# Altium PCB RF_PCB-v1.PcbDoc (part 1 of 2)
Units mil, origin at the board's own origin, x right, y up, seen from the top; angles counter-clockwise.
Board outline 4468.5 x 3267.72 mil, 2 copper layers (Top Layer, Bottom Layer); 64 components, 52 nets, 328 pads, 70 vias.
Unrouted connection lines stored in the file: 1.
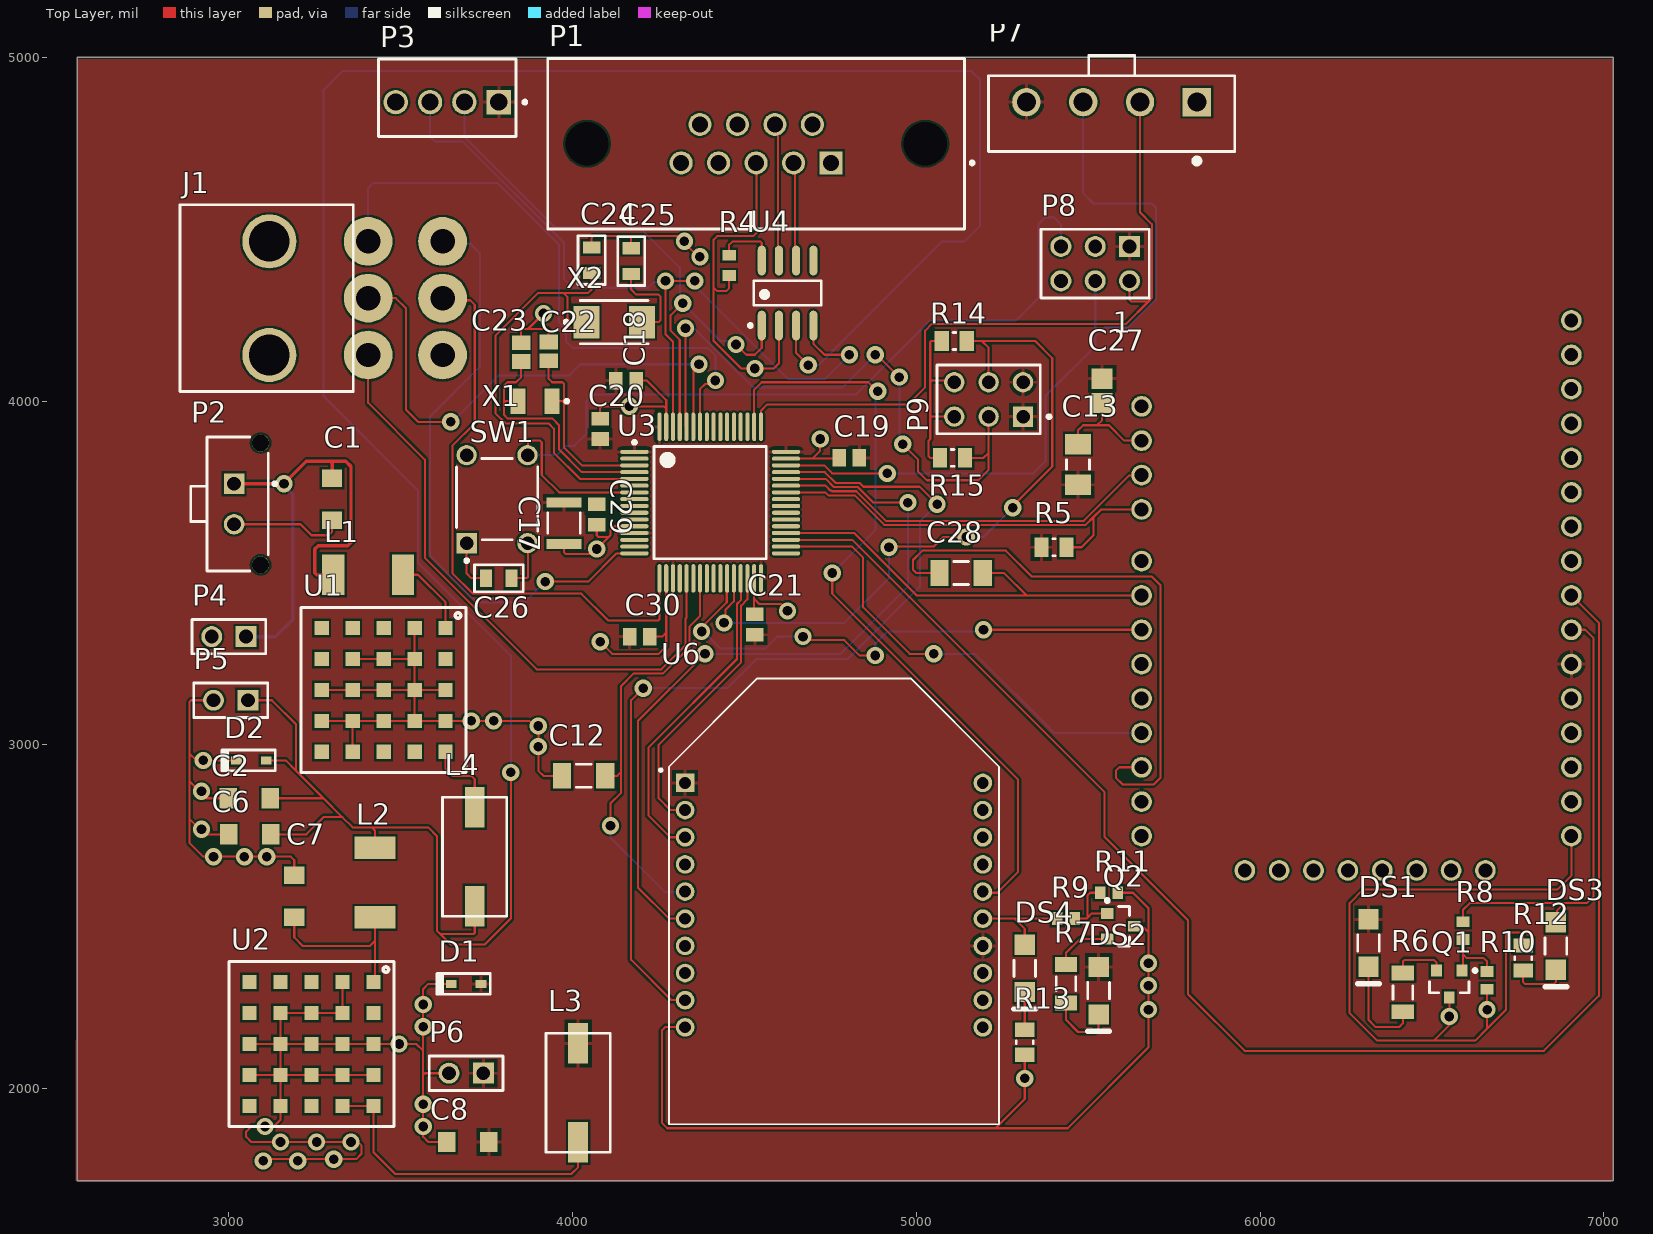
[diagram p0: Top Layer view]
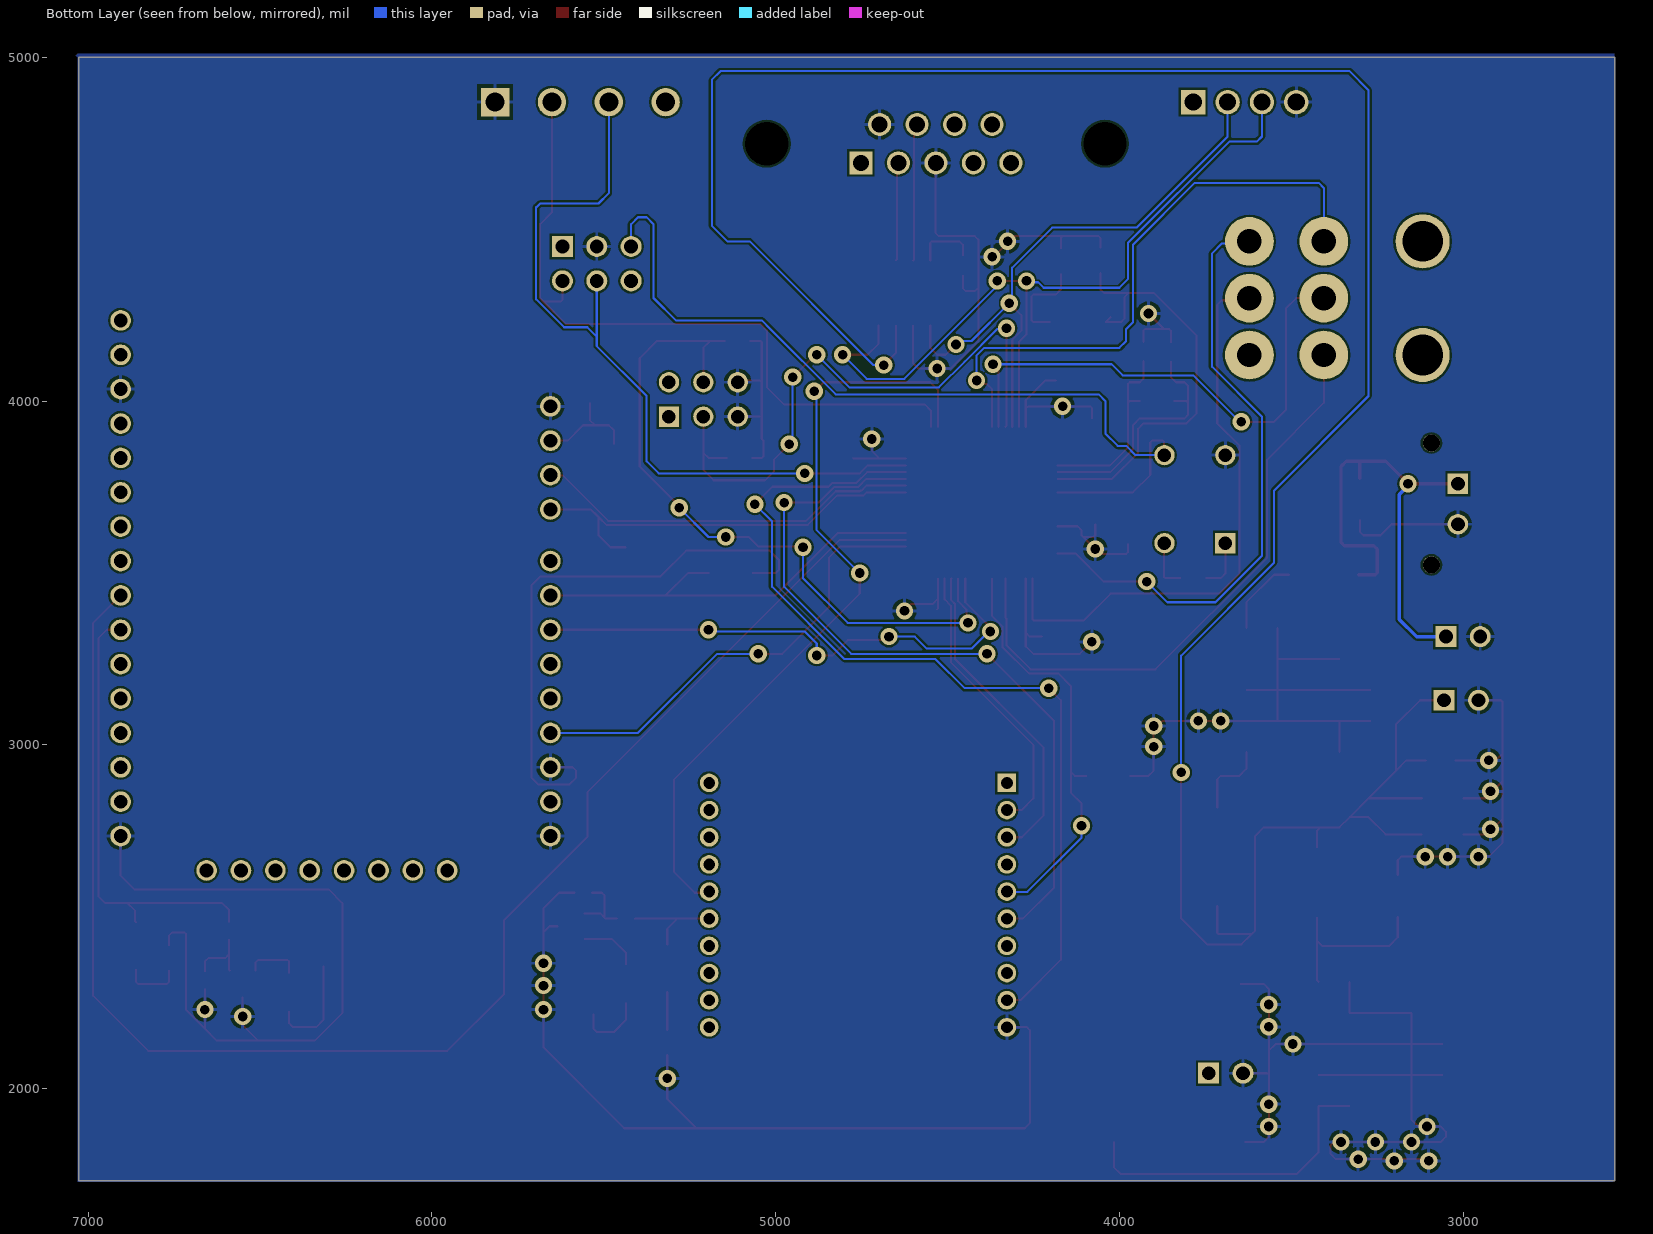
[diagram p1: Bottom Layer view, seen from below]

## Layer stack, top to bottom
Top Solder: solder mask 0.4, Solder Resist, Dk 3.5
Top Layer: signal copper 1.4
Dielectric 1: dielectric 12.6, FR-4, Dk 4.8
Bottom Layer: signal copper 1.4
Bottom Solder: solder mask 0.4, Solder Resist, Dk 3.5

## Board outline
2559.06,1732.28 7027.56,1732.28 7027.56,5000 2559.06,5000

## Design rules (kind name [scope] priority, off if disabled: settings)
Clearance [All] p1: gap=6 ignorepadtopadclearanceinfootprint=FALSE
HoleSize [All] p1: absolutevalues=TRUE maxlimit=3937.01 minlimit=15.75 maxpercent=80.000 minpercent=20.000
PolygonConnect [All] p1: connectstyle=Relief reliefconductorwidth=10 reliefentries=4 polygonreliefangle="90 Angle" airgapwidth=10
RoutingVias [All] p1: holewidth=15.75 width=31.5 viastyle="Through Hole" minholewidth=15.75 minwidth=23.62 maxholewidth=3937.01 maxwidth=3937.01
SilkToSilkClearance [All] p1: silktosilkclearance=0
SilkToSolderMaskClearance [IsPad] p1: minsilkscreentomaskgap=0 clearancetoexposedcopper=TRUE
SolderMaskExpansion [All] p1: expansion=4 istentingtop=FALSE
Width [All] p1: maxlimit=3937.01 minlimit=6 preferedwidth=10
27 further rules are at their usual default settings.

## Classes and differential pairs
component class RF_Xbee: 1 C12 C13 C27 C28 DS1 DS2 DS3 DS4 Q1 Q2 R5 R6 R7 R8 R9 R10 R11 R12 R13 U6
component class RF_STM: C17 C18 C19 C20 C21 C22 C23 C24 C25 C26 C29 C30 J1 P1 P3 P7 P8 P9 R4 R14 R15 SW1 U3 U4 X1 X2
component class RF_Power: C1 C2 C6 C7 C8 D1 D2 L1 L2 L3 L4 P2 P4 P5 P6 U1 U2

## Components (designator, comment, footprint, x,y, rotation, side; value= is the part's Value field where it differs from the comment)
1 "XBEE_SMD_ADAPTER" XBEE_SMD_ADAPTER 6305,3485 r0 top
C1 "10uF" 1206 3300,3715 r270 top
C2 "22uF" 1206 3058.98,2845 r0 top
C6 "10uF" 1206 3060,2740 r180 top
C7 "10uF" 1206 3190,2560 r270 top
C8 "22uF" 1206 3695,1845 r0 top
C12 "0.01uF" CAPC1206(3216)170_M 4032.01,2910 r0 top value=10nF
C13 "1uF" CAPC3216X180X50ML20T25 5470,3815.94 r270 top
C17 "1uF" CAPC3225X270X30LL30 3975,3645 r90 top
C18 "0.1uF" CAPC2013X135X50LL10T20 4155,4060 r180 top
C19 "0.1uF" CAPC2013X135X50LL10T20 4804.53,3835 r0 top
C20 "0.1uF" CAPC2013X135X50LL10T20 4080,3919.53 r270 top
C21 "0.1uF" CAPC2013X135X50LL10T20 4530,3350 r270 top
C22 "6nF" CAPC2013X140X50LL20T25 3930,4145 r270 top
C23 "6nF" CAPC2013X140X50LL20T25 3850,4142.56 r270 top
C24 "20pF" C0805 4055,4410 r270 top
C25 "20pF" C0805 4170,4407.4 r270 top
C26 "0.1uF" C0805 3785,3485 r180 top
C27 "100pF" CAPC2013X88X50ML20T25 5540,4030 r90 top
C28 "0.01uF" CAPC1206(3216)170_M 5130,3500 r0 top value=10nF
C29 "0.1uF" CAPC2013X135X50LL10T20 4070,3670 r90 top
C30 "0.1uF" CAPC2013X135X50LL10T20 4195,3315 r180 top
D1 "TVS Diode 3V3" SOD-323 3690,2305 r0 top
D2 "TVS Diode 5V" SOD-323 3065,2955 r0 top
DS1 "HSMH-C150" AVAG-HSMX-C150_V 6315,2423.9 r270 top
DS2 "HSMH-C150" AVAG-HSMX-C150_V 5530,2285 r270 top
DS3 "HSMH-C150" AVAG-HSMX-C150_V 6860,2415 r270 top
DS4 "HSMH-C150" AVAG-HSMX-C150_V 5315,2350 r270 top
J1 "0353180620" "Mini-fit Jr. 6pos" 3369.57,4299.65 r270 top
L1 "70" 1812#1 3405,3495 r180 top
L2 "70" 1812#2 3425,2600 r270 top
L3 "98" 7427932 4015.75,1988.19 r90 top
L4 "98" 7427932 3715,2675 r270 top
P1 "171-009-113R911" NORCO-171-009-113R911_V 4533.58,4749.09 r180 top
P2 "66200211122" 66200211122 3025.04,3700.94 r90 top
P3 "640456-4" TECO-640456-4 3635,4870 r0 top
P4 "12V EXT" SMTC-TSW-102-26-XX-S 3050,3315 r180 top
P5 "5V EXT" SMTC-TSW-102-26-XX-S 3055,3130 r180 top
P6 "3V3 EXT" SMTC-TSW-102-26-XX-S 3740,2045 r180 top
P7 "64900411122" 64900411122 5567.68,4836.54 r0 top
P8 "SWD" SMTC-TSW-103-08-X-D 5620,4450 r180 top
P9 "M20-9980346" HRWN-M20-9980346_V 5210,4005 r180 top
Q1 "BJT" ONSC-SOT-23-3-318-08_V 6550,2304.37 r270 top
Q2 "BJT" ONSC-SOT-23-3-318-08_V 5594.37,2472.6 r0 top
R4 "1K" RESC1608X55X25ML10T15 4455,4395 r90 top
R5 "1K" RESC2013X50X30NL20T20 5400,3575 r180 top
R6 "464 Ohm" RESC3216X70X50NL05T20 6415,2280 r270 top
R7 "464 Ohm" RESC3216X70X50NL05T20 5435,2305 r270 top
R8 "10K" RESC1609X50X30NL8T20 6590,2460 r270 top
R9 "10K" RESC1609X50X30NL8T20 5435,2495 r0 top
R10 "10K" RESC1609X50X30NL8T20 6660,2315 r270 top
R11 "10K" RESC1609X50X30NL8T20 5560,2570 r0 top
R12 "1K" RESC2013X50X30NL20T20 6765,2380 r270 top
R13 "1K" RESC2013X50X30NL20T20 5315,2135 r90 top
R14 "1K" RESC2013X50X30NL20T20 5110,4175 r0 top
R15 "1K" RESC2013X50X30NL20T20 5105,3835 r0 top
SW1 "PTS645SM43SMTR92LFS" ITT-PTS645S-4_V 3780,3715 r90 top
U1 "RPM5.0-1.0" 25-BLGA 3449.84,3160 r270 top
U2 "RPM3.3-1.0" 25-BLGA 3240,2130 r270 top
U3 "STM32F107RCT6" STM-LQFP64_M 4400,3705 r0 top
U4 "MCP2551-I/SN" SOIC-SN8_N 4625,4314.49 r90 top
U6 "XBP24CAUIT-001" *MODULE_XBP24CAUIT-001 4760,2545 r0 top
X1 "32.768KHz" ABRA-ABS07-2_V 3890,4000 r180 top
X2 "8MHz" ABRA-ABM3-2_V 4120.71,4230 r0 top

## Footprints (in the part's own frame and the unit in brackets; to place one, negate y for a bottom-side part, rotate by r counter-clockwise, add the part's x,y. Pads: shape width x height; smd on the part's side, far side on the other; paste and mask are expansions set on the pad)
25-BLGA [mm]
  rect 1.06x1.06 smd: A1(-4.58,4.58) A2(-2.29,4.58) A3(0,4.58) A4(2.29,4.58) A5(4.58,4.58) B1(-4.58,2.29) B2(-2.29,2.29) B3(0,2.29) B4(2.29,2.29) B5(4.58,2.29) C1(-4.58,0) C2(-2.29,0) C3(0,0) C4(2.29,0) C5(4.58,0) D1(-4.58,-2.29) D2(-2.29,-2.29) D3(0,-2.29) D4(2.29,-2.29) D5(4.58,-2.29) E1(-4.58,-4.58) E2(-2.29,-4.58) E3(0,-4.58) E4(2.29,-4.58) E5(4.58,-4.58)
  silkscreen extent -6.09,-6.09 6.09,6.09
1206 [mil]
  rect 51.18x59.06 smd: 1(-61.02,0) 2(61.02,0)
1812#1 [mm]
  rect 1.65x3 smd: 1(2.575,0) 2(-2.575,0)
1812#2 [mm]
  rect 1.65x3 smd: 1(-2.575,0) 2(2.575,0)
7427932 [mm]
  rect 3x1.47 smd: 1(-3.65,0) 2(3.65,0)
  silkscreen extent -4.4,-2.37 4.4,2.37, body extent -4.1,-2.38 4.1,2.37, height 3.21
64900411122 [mm] "4.20mm Male Single Row Vertical Header, 4p"
  rect 2.1x2.1 hole 1.4: 1(6.3,0.85)
  round 2.1 hole 1.4: 2(2.1,0.85) 3(-2.1,0.85) 4(-6.3,0.85)
  silkscreen extent -9.1,-3.7 9.1,4.3, body extent -9,-2.7 9,4.2, height 12.83
66200211122 [mm] "3.00mm Male Single Row Vertical Header, 2p"
  rect 1.52x1.52 hole 1.02: 1(1.5,0.255)
  round 1.52 hole 1.02: 2(-1.5,0.255)
  round 1.27 hole 1.27 unplated: MH1(-4.5,-1.705) MH2(4.5,-1.705)
  silkscreen extent -4.95,-2.88 4.95,3.46, body extent -4.83,-2.18 4.83,3.38, height 9.93
*MODULE_XBP24CAUIT-001 [mil]
  rect 54.25x54.25 hole 34.25: 1(-433,344.5)
  round 54.25 hole 34.25: 2(-433,265.5) 3(-433,186.5) 4(-433,107.5) 5(-433,28.5) 6(-433,-50.5) 7(-433,-129.5) 8(-433,-208.5) 9(-433,-287.5) 10(-433,-366.5) 11(433,-366.5) 12(433,-287.5) 13(433,-208.5) 14(433,-129.5) 15(433,-50.5) 16(433,28.5) 17(433,107.5) 18(433,186.5) 19(433,265.5) 20(433,344.5)
  silkscreen extent -508,-648 480,648
ABRA-ABM3-2_V [mm] "SMD, 2-Leads, Body 5x3.2mm, Pitch 4.1mm"
  rect 1.9x2.4 smd: 1(-2.05,0) 2(2.05,0)
  silkscreen extent -3.67,-1.6 2.5,1.6, body extent -2.5,-1.6 2.5,1.6, height 1.3
ABRA-ABS07-2_V [mm] "Hand Drawn, 2-Leads, Body 3.2x1.5mm, Pitch 2.5mm"
  rect 1.1x1.9 smd: 1(-1.25,0) 2(1.25,0)
  silkscreen extent -2.48,-0.12 -2.23,0.12, body extent -1.6,-0.75 1.6,0.75, height 0.9
AVAG-HSMX-C150_V [mm] "SMD, 2-Leads, Body 3.2x1.6mm"
  rect 1.5x1.5 smd: 1(-1.75,0) 2(1.75,0)
  silkscreen extent -0.6,-0.8 3,0.8, body extent -1.6,-0.8 1.6,0.8, height 1.1
C0805 [mm]
  rect 0.9x1.3 smd: 1(-0.95,0) 2(0.95,0)
  silkscreen extent -1.8,-1 1.8,1, body extent -1.05,-0.67 1.05,0.67, height 0.94
CAPC1206(3216)170_M [mm] "Chip Capacitor, Body 3.2x1.6mm, Height 1.7mm, IPC Low Density"
  rect 1.35x1.9 smd: 1(-1.6,0) 2(1.6,0)
  silkscreen extent -0.55,-0.85 0.55,0.85, body extent -1.7,-0.9 1.7,0.9, height 1.7
CAPC2013X88X50ML20T25 [mm] "Chip Capacitor, 2-Leads, Body 2.00x1.25mm, IPC Low Density"
  rect 1.5x1.55 smd: 1(-0.9,0) 2(0.9,0)
  body extent -1.1,-0.72 1.1,0.72, height 0.88
CAPC2013X135X50LL10T20 [mm] "Chip Capacitor, 2-Leads, Body 2.00x1.25mm, IPC High Density"
  rect 1x1.3 smd: 1(-0.75,0) 2(0.75,0)
  body extent -1.05,-0.67 1.05,0.68, height 1.35
CAPC2013X140X50LL20T25 [mm] "Chip Capacitor, 2-Leads, Body 2.00x1.25mm, IPC High Density"
  rect 1.1x1.35 smd: 1(-0.7,0) 2(0.7,0)
  body extent -1.1,-0.72 1.1,0.72, height 1.4
CAPC3216X180X50ML20T25 [mm] "Chip Capacitor, 2-Leads, Body 3.40x1.80mm, IPC Low Density"
  rect 1.5x1.9 smd: 1(-1.5,0) 2(1.5,0)
  silkscreen extent -0.35,-0.85 0.35,0.85, body extent -1.7,-0.9 1.7,0.9, height 1.8
CAPC3225X270X30LL30 [mm] "Chip Capacitor, 2-Leads, Body 3.5x2.7mm, IPC High Density"
  rect 0.75x2.6 smd: 1(-1.525,0) 2(1.525,0)
  silkscreen extent -0.75,-1.2 0.75,1.2, body extent -1.75,-1.35 1.75,1.35, height 2.7
HRWN-M20-9980346_V [mm] "THD, 6-Leads, Body 7.62x5.08mm, Pitch 2.54mm"
  rect 1.5x1.5 hole 1: 1(-2.54,1.27)
  round 1.5 hole 1: 2(-2.54,-1.27) 3(0,1.27) 4(0,-1.27) 5(2.54,1.27) 6(2.54,-1.27)
  silkscreen extent -4.59,-2.54 3.81,2.54, body extent -3.81,-2.54 3.81,2.54, height 8.64
ITT-PTS645S-4_V [mm] "TH, 4-Leads, Body 6x6mm"
  rect 1.5x1.5 hole 1: 1(-3.25,2.25)
  round 1.5 hole 1: 2(3.25,2.25) 3(-3.25,-2.25) 4(3.25,-2.25)
  silkscreen extent -4.67,-3 3,3, body extent -3,-3 3,3, height 4.4
"Mini-fit Jr. 6pos" [mm]
  round 3.6 hole 1.8: 1(-4.2,6.4) 2(0,6.4) 3(4.2,6.4) 4(-4.2,0.9) 5(0,0.9) 6(4.2,0.9)
  round 4 hole 3: ""(-4.2,-6.4) ""(4.2,-6.4)
  silkscreen extent -6.9,-13 6.9,-0.2, body extent -6.9,-13 7.3,6.94, height 11.41
NORCO-171-009-113R911_V [mm] "THD, 9-Leads, Body 30.8x12.6mm, Pitch 2.77mm"
  rect 1.7x1.7 hole 1.194: 1(-5.54,1.42)
  round 1.7 hole 1.194: 2(-2.77,1.42) 3(0,1.42) 4(2.77,1.42) 5(5.54,1.42) 6(-4.155,-1.42) 7(-1.385,-1.42) 8(1.385,-1.42) 9(4.155,-1.42)
  round 2.9 hole 3.2 unplated: MH1(-12.495,0) MH2(12.495,0)
  silkscreen extent -16.09,-6.3 15.4,6.3, body extent -15.4,-6.3 15.41,6.3, height 13.24
ONSC-SOT-23-3-318-08_V [mm] "SOT23, 3-Leads, Body 2.92x1.3mm, Pitch 0.95mm"
  rect 0.9x0.8 smd: 1(-1,0.95) 2(-1,-0.95) 3(1,0)
  silkscreen extent -1.12,-1.46 0.65,2.03, body extent -0.65,-1.46 0.65,1.46, height 1.11
RESC1608X55X25ML10T15 [mm] "Chip Resistor, 2-Leads, Body 1.60x0.80mm, IPC Low Density"
  rect 0.8x1 smd: 1(-0.75,0) 2(0.75,0)
  body extent -0.85,-0.45 0.85,0.45, height 0.55
RESC1609X50X30NL8T20 [mm] "Chip Resistor, 2-Leads, Body 1.65x0.95mm, IPC Medium Density"
  rect 0.8x0.95 smd: 1(-0.65,0) 2(0.65,0)
  body extent -0.82,-0.48 0.82,0.48, height 0.5
RESC2013X50X30NL20T20 [mm] "Chip Resistor, 2-Leads, Body 2.00x1.25mm, IPC Medium Density"
  rect 1.05x1.45 smd: 1(-0.925,0) 2(0.925,0)
  silkscreen extent -0.1,-0.63 0.1,0.63, body extent -1.1,-0.72 1.1,0.72, height 0.5
RESC3216X70X50NL05T20 [mm] "Chip Resistor, 2-Leads, Body 3.20x1.60mm, IPC Medium Density"
  rect 1.1x1.65 smd: 1(-1.425,0) 2(1.425,0)
  silkscreen extent -0.5,-0.72 0.5,0.72, body extent -1.63,-0.82 1.62,0.82, height 0.7
SMTC-TSW-102-26-XX-S [mm] ".025 SQ Post Terminal Strip Assembly, 1x2 Pins, Vertical, 2.54mm Pitch, Male"
  rect 1.55x1.55 hole 1.02: 1(0,0)
  round 1.55 hole 1.02: 2(2.54,0)
  silkscreen extent -1.46,-1.27 4,1.27, body extent -1.4,-1.27 3.81,1.27, height 8.38
SMTC-TSW-103-08-X-D [mm] ".025 SQ Post Terminal Strip Assembly, 2x3 Pins, Vertical, 2.54mm Pitch, Male"
  rect 1.55x1.55 hole 1.02: 1(0,0)
  round 1.55 hole 1.02: 2(0,2.54) 3(2.54,0) 4(2.54,2.54) 5(5.08,0) 6(5.08,2.54)
  silkscreen extent -1.46,-1.27 6.54,3.81, body extent -1.27,-1.27 6.35,3.81, height 8.38
SOD-323 [mm] "SOD, 2-Leads, Body 1.7x1.25mm"
  rect 0.8x0.6 smd: 1(-1.1,0) 2(1.1,0)
  silkscreen extent -2.16,-0.76 1.78,0.76, body extent -1.3,-0.67 1.3,0.68, height 1.1
SOIC-SN8_N [mm] "SOIC, 8-Leads, Body 4.9x3.9mm, Pitch 1.27mm, IPC Medium Density"
  oval 2.2x0.6 smd: 1(-2.4,1.905) 2(-2.4,0.635) 3(-2.4,-0.635) 4(-2.4,-1.905) 5(2.4,-1.905) 6(2.4,-0.635) 7(2.4,0.635) 8(2.4,1.905)
  silkscreen extent -2.52,-2.5 0.9,2.88, body extent -2,-2.5 2,2.5, height 1.75
STM-LQFP64_M [mm] "Thin QFP, 64-Leads, Body 10x10mm, Pitch 0.5mm, IPC Low Density"
  oval 2.1x0.3 smd: 1(-5.6,3.75) 2(-5.6,3.25) 3(-5.6,2.75) 4(-5.6,2.25) 5(-5.6,1.75) 6(-5.6,1.25) 7(-5.6,0.75) 8(-5.6,0.25) 9(-5.6,-0.25) 10(-5.6,-0.75) 11(-5.6,-1.25) 12(-5.6,-1.75) 13(-5.6,-2.25) 14(-5.6,-2.75) 15(-5.6,-3.25) 16(-5.6,-3.75) 33(5.6,-3.75) 34(5.6,-3.25) 35(5.6,-2.75) 36(5.6,-2.25) 37(5.6,-1.75) 38(5.6,-1.25) 39(5.6,-0.75) 40(5.6,-0.25) 41(5.6,0.25) 42(5.6,0.75) 43(5.6,1.25) 44(5.6,1.75) 45(5.6,2.25) 46(5.6,2.75) 47(5.6,3.25) 48(5.6,3.75)
  oval 0.3x2.1 smd: 17(-3.75,-5.6) 18(-3.25,-5.6) 19(-2.75,-5.6) 20(-2.25,-5.6) 21(-1.75,-5.6) 22(-1.25,-5.6) 23(-0.75,-5.6) 24(-0.25,-5.6) 25(0.25,-5.6) 26(0.75,-5.6) 27(1.25,-5.6) 28(1.75,-5.6) 29(2.25,-5.6) 30(2.75,-5.6) 31(3.25,-5.6) 32(3.75,-5.6) 49(3.75,5.6) 50(3.25,5.6) 51(2.75,5.6) 52(2.25,5.6) 53(1.75,5.6) 54(1.25,5.6) 55(0.75,5.6) 56(0.25,5.6) 57(-0.25,5.6) 58(-0.75,5.6) 59(-1.25,5.6) 60(-1.75,5.6) 61(-2.25,5.6) 62(-2.75,5.6) 63(-3.25,5.6) 64(-3.75,5.6)
  silkscreen extent -5.72,-4.15 4.15,4.57, body extent -5,-5 5,5, height 1.6
TECO-640456-4 [mm] "Through Hole, 4-Leads, Body 10.16x5.72mm, Pitch 2.54mm"
  rect 1.8x1.8 hole 1.27 paste+0: 1(3.81,0)
  round 1.8 hole 1.27 paste+0: 2(1.27,0) 3(-1.27,0) 4(-3.81,0)
  silkscreen extent -5.08,-2.54 5.86,3.18, body extent -5.08,-2.54 5.08,3.18, height 10.03
XBEE_SMD_ADAPTER [mil]
  round 60.24 / inner round 60 / far side round 60.24 hole 40.16: 1(-650,500) 2(-650,400) 3(-650,300) 4(-650,200) 5(-650,50) 6(-650,-50) 7(-650,-150) 8(-650,-250) 9(-650,-350) 10(-650,-450) 11(-650,-550) 12(-650,-650) 13(-650,-750) 14(-350,-850) 15(-250,-850) 16(-150,-850) 17(-50,-850) 18(50,-850) 19(150,-850) 20(250,-850) 21(350,-850) 22(600,-750) 23(600,-650) 24(600,-550) 25(600,-450) 26(600,-350) 27(600,-250) 28(600,-150) 29(600,-50) 30(600,50) 31(600,150) 32(600,250) 33(600,350) 34(600,450) 35(600,550) 36(600,650) 37(600,750)

## Part data
C1 C6 C7: library part CL31B106KAHNFNE, "CAP CER 10UF 25V X7R 1206", Case Code (Imperial)=1206, Case Code (Metric)=3216, Dielectric=X7R, Manufacturer=Samsung, Max Operating Temperature=125°C, Min Operating Temperature=-55°C, Package Quantity=1, Supplier Part Number 1=1276-3100-1-ND, Tolerance=10%, Voltage Rating=25V, Capacitance=10uF, Case/Package=1206, Category="Ceramic Capacitors", ComponentLink1Description=https://datasheet.ciiva.com/25795/cl31b106kahnfne-25795136.pdf?src-supplier=Digi-Key, ComponentLink1URL=https://datasheet.ciiva.com/25795/cl31b106kahnfne-25795136.pdf?src-supplier=Digi-Key, Depth=1.6mm, Height=1.6mm, Lead Free="Lead Free", Length=3.2mm, Manufacturer Part Number=CL31B106KAHNFNE, Mount="Surface Mount", Packaging="Tape and Reel", Radiation Hardening=No, RoHS=Yes, Stock 1=1201, Supplier 1=Digi-Key, Thickness=0.071inch, Width=0.063inch
C2 C8: library part CL31B226KPHNNNE, "CAP CER 22UF 10V X7R 1206", Case Code (Imperial)=1206, Case Code (Metric)=3216, Dielectric=X7R, Manufacturer=Samsung, Max Operating Temperature=125°C, Min Operating Temperature=-55°C, Package Quantity=2000, Supplier Part Number 1=1276-2769-1-ND, Tolerance=10%, Voltage Rating=10V, Capacitance=22uF, Case/Package=1206, Category="Ceramic Capacitors", ComponentLink1Description=https://datasheet.ciiva.com/25724/cl31b226kphnnne-25724443.pdf?src-supplier=Digi-Key, ComponentLink1URL=https://datasheet.ciiva.com/25724/cl31b226kphnnne-25724443.pdf?src-supplier=Digi-Key, ComponentLink2Description=https://datasheet.ciiva.com/16384/cl31b226kphnnne-16384588.pdf?src-supplier=Future+Electronics, ComponentLink2URL=https://datasheet.ciiva.com/16384/cl31b226kphnnne-16384588.pdf?src-supplier=Future+Electronics, ComponentLink3Description=https://datasheet.ciiva.com/26838/getdatasheetpartid-710483-26838941.pdf?src-supplier=Verical, ComponentLink3URL=https://datasheet.ciiva.com/26838/getdatasheetpartid-710483-26838941.pdf?src-supplier=Verical, Contact Plating=Tin, Depth=1.6mm, Lead Free="Lead Free", Length=3.2mm, Manufacturer Part Number=CL31B226KPHNNNE, Mount="Surface Mount", Packaging="Tape and Reel", Radiation Hardening=No, RoHS=Yes, Stock 1=617814, Supplier 1=Digi-Key, Termination=Wraparound, Thickness=0.071inch, Voltage Rating (DC)=10V, Width=0.063inch
C12 C28: library part CMP-1037-03508-1, "CAP 10nF 50V ±5% 1206 (3216 Metric) Thickness 1.7mm SMD", Case-EIA=1206, Case-Metric=3216, Rated Voltage="50 V", Tolerance=Â±5%, Max Thickness="1.7 mm", Technology=SMT
C13: library part CMP-2000-04991-1, "Chip Capacitor, 1 uF, +/- 10%, 25 V, -55 to 125 degC, 1206 (3216 Metric), RoHS, Tape and Reel", Capacitance - nF=1000nF, Case Code - in=1206, Case Code - mm=3216, Case Height=1.6mm, Case Length=3.2mm, Dielectric=X7R, Manufacturer=Kemet, Maximum Operating Temperature=+125C, Minimum Operating Temperature=-55C, Operating Temperature Range=-55Cto+125C, Package / Case=1206(3216metric), Package Description="2-Pin Surface Mount Device, Body 3.2 x 1.6 mm", Temperature Coefficient / Code=+/-15%, Tolerance=10%, Voltage Rating=25V, =C1206C105K3RAC7800, Brand=Kemet, Capacitance=1uF, Case Width=1.6mm, Class=Class1, Datasheet URL=https://ciiva.com/datasheet-click-18194173?src=ciiva&sig=6daff8c4, Datasheet Version=Jul-14, Dimensions=1.6mmWx3.2mmLx1.6mmH, Factory Pack Quantity=2000, Manufacturer URL=http://www.kemet.com/, Package Reference=1206, Packaging=Reel, Product=GeneralTypeMLCCs, Product Category=MultilayerCeramicCapacitorsMLCC-SMD/SMT, RoHS=Details, Series=C1206C, Termination Style=SMD/SMT, Type=SMDMLCCX7R6.3-250VDCCommericalGrade, Voltage Rating DC=25V
C17: library part CMP-2000-06366-1, "Chip Capacitor, 1 uF, +/- 10%, 100 V, -55 to 125 degC, 1210 (3225 Metric), RoHS, Tape and Reel", Capacitance=1µF, Manufacturer=Murata, Operating Temperature=-55°C~125°C, Package / Case=1210(3225Metric), Package Description="2-Pin Surface Mount Device, Body 3.2 x 2.5 mm", Package Reference=1210, Ratings=-, Standard Package=1, Temperature Coefficient=X7R, Tolerance=±10%, Voltage - Rated=100V, Applications=GeneralPurpose, Catalog Drawings=GRMSeries_1210_2.5, Category=Capacitors, Datasheet URL=http://search.murata.co.jp/Ceramy/image/img/A01X/G101/ENG/GRM32ER72A105KA01-01.pdf, Datasheet Version=02/2016, Family=CeramicCapacitors, Featured Product=GA3SafetyRecognizedCapsandHi-CapMLCC, Features=-, Height - Seated (Max)=-, Lead Spacing=-, Lead Style=-, Manufacturer URL=http://www.murata.com/, Mounting Technology=SurfaceMount, Mounting Type=SurfaceMount,MLCC, Online Catalog=GRMSeries, Other Names=490-1857-6, Packaging=Digi-Reel®, Product Training Modules=High-CapMultilayerCeramicCapacitors, Series=GRM, Size / Dimension="0.126\"Lx0.098\"W(3.20mmx2.50mm)", Thickness (Max)="0.106\"(2.70mm)"
C18 C19 C20 C21 C29 C30: library part CMP-2007-03453-1, Manufacturer=Murata, Part Number=GRM21BR61C106KE15L
C22 C23: library part CMP-2000-05810-1, "Chip Capacitor, 2.2 uF, +/- 10%, 10 V, -55 to 85 degC, 0805 (2012 Metric), RoHS, Tape and Reel", Capacitance=2.2µF, Case Size/Dimension=0805, Dielectric=X5R, Manufacturer=AVX, Package Description="2-Pin Surface Mount Device, Body 2.01 x 1.25 mm", Rated Voltage=10V, Tolerance (%)=±10%, Datasheet URL=http://datasheets.avx.com/cx5r.pdf, Datasheet Version=05/2016, Manufacturer URL=http://www.avx.com/, Mounting Technology=SurfaceMount, Package Reference=0805
C24 C25: library part C0805C200J5GACTU, "CAP CER 20PF 50V C0G/NP0 0805", Capacitance=10nF, Case Code (Imperial)=0805, Case Code (Metric)=2012, Dielectric=X7R, Manufacturer=Samsung, Manufacturer Part Number=CL21B103KBANNNC, Max Operating Temperature=125°C, Min Operating Temperature=-55°C, Supplier Part Number 1=399-8033-1-ND, Tolerance=10%, Voltage=50V, Case/Package=0805, Category=Capacitors, ComponentLink1Description=https://www.digikey.com/product-detail/en/kemet/C0805C200J5GACTU/399-8033-1-ND/3471756, ComponentLink1URL=https://www.digikey.com/product-detail/en/kemet/C0805C200J5GACTU/399-8033-1-ND/3471756, Contact Plating=Tin, Depth=1.25mm, Height=0.65mm, Lead Free="Lead Free", Length=2mm, Material=Ceramic, Mount="Surface Mount", Packaging="Tape and Reel", Radiation Hardening=No, RoHS=Yes, Supplier 1=Digi-Key, Thickness=0.03inch, Voltage Rating=50V, Voltage Rating (DC)=50V, Width=0.049inch
C26: library part CL21B104KBCWPNC, "CAP CER 0.1UF 50V X7R 0805", Capacitance=100nF, Case Code (Imperial)=0805, Case Code (Metric)=2012, Manufacturer=Samsung, Max Operating Temperature=125°C, Min Operating Temperature=-55°C, Ratings=AEC-Q200, Supplier Part Number 1=1276-6557-1-ND, Tolerance=10%, Voltage Rating=50V, Case/Package=0805, Category=Capacitors, Features="Soft Termination", Length=0.079inch, Manufacturer Part Number=CL21B104KBCWPNC, Mount="Surface Mount", Packaging="Tape and Reel", Pricing 1="1 = 0.10000, 10 = 0.06700, 100 = 0.02990, 500 = 0.02138, 1000 = 0.01680 (USD)", RoHS=Yes, Stock 1=6545, Supplier 1=Digi-Key, Thickness=0.053inch, Width=0.049inch
C27: library part CMP-2007-00223-1, Manufacturer=Kemet, Part Number=C0805C101J2GACTU
D1: library part CDSOD323-T03S, "ESD Suppressor TVS ±30kV 2-Pin SOD-323 T/R", Breakdown Voltage=4V, Capacitance=500pF, Case/Package=SOD-323-2, Clamping Voltage=10.9V, Leakage Current=125uA, Manufacturer=Bourns, Max Operating Temperature=150°C, Max Power Dissipation=500W, Max Surge Current=43A, Min Operating Temperature=-55°C, Operating Supply Voltage=3.3V, Package Quantity=3000, Power Line Protection=No, Supplier Part Number 1=CDSOD323-T03SCT-ND, Category="Circuit Protection", ComponentLink1Description=https://datasheet.ciiva.com/22685/1671000-22685541.pdf?src-supplier=Element14, ComponentLink1URL=https://datasheet.ciiva.com/22685/1671000-22685541.pdf?src-supplier=Element14, ComponentLink2Description=https://datasheet.ciiva.com/6575/cdsod323-txxsc-6575941.pdf?src-supplier=Digi-Key, ComponentLink2URL=https://datasheet.ciiva.com/6575/cdsod323-txxsc-6575941.pdf?src-supplier=Digi-Key, ComponentLink3Description=https://datasheet.ciiva.com/11193/cdsod323-txxsc-11193742.pdf?src-supplier=Avnet, ComponentLink3URL=https://datasheet.ciiva.com/11193/cdsod323-txxsc-11193742.pdf?src-supplier=Avnet, Composition=Zener, Contact Plating=Tin, Depth=1.45mm, Direction=Unidirectional, Element Configuration=Single, Length=1.9mm, Manufacturer Part Number=CDSOD323-T03S, Min Breakdown Voltage=4V, Mount="Surface Mount", Number of Channels=1, Number of Pins=2, Number of Unidirectional Channels=1, Packaging="Tape and Reel", Peak Pulse Current=43A, Peak Pulse Power=500W, Polarity=Unidirectional, Pricing 1="1 = 0.72000, 10 = 0.60600, 25 = 0.53000, 100 = 0.45420, 250 = 0.39368, 500 = 0.33310, 1000 = 0.25740 (USD)", Radiation Hardening=No, REACH SVHC="No SVHC", Reverse Standoff Voltage=3.3V, RoHS=Yes, Stock 1=99362, Supplier 1=Digi-Key, Termination=SMD/SMT, Working Voltage=3.3V
D2: library part SD05T1G, "TVS DIODE 5V 9.8V SOD323", Breakdown Voltage=6.75V, Capacitance=350pF, Case/Package=SOD-323-2, Clamping Voltage=14.5V, Leakage Current=10uA, Manufacturer="ON Semiconductor", Max Breakdown Voltage=7.3V, Max Operating Temperature=150°C, Max Output Current=24A, Max Power Dissipation=200mW, Min Breakdown Voltage=6.2V, Min Operating Temperature=-55°C, Operating Supply Voltage=5V, Package Quantity=1, Peak Pulse Power=350W, Power Line Protection=No, Supplier Part Number 1=SD05T1GOSCT-ND, Test Current=1mA, Category="Circuit Protection", ComponentLink1Description=https://datasheet.ciiva.com/4507/sd05t1-d-241634-4507873.pdf?src-supplier=Mouser, ComponentLink1URL=https://datasheet.ciiva.com/4507/sd05t1-d-241634-4507873.pdf?src-supplier=Mouser, ComponentLink2Description=https://datasheet.ciiva.com/16200/sd05t1-d-16200994.pdf?src-supplier=Future+Electronics, ComponentLink2URL=https://datasheet.ciiva.com/16200/sd05t1-d-16200994.pdf?src-supplier=Future+Electronics, ComponentLink3Description=https://datasheet.ciiva.com/15143/getdatasheetpartid-117154-15143559.pdf?src-supplier=Verical, ComponentLink3URL=https://datasheet.ciiva.com/15143/getdatasheetpartid-117154-15143559.pdf?src-supplier=Verical, ComponentLink4Description=https://datasheet.ciiva.com/30478/0900766b81250bd7-30478714.pdf?src-supplier=RSComponents, ComponentLink4URL=https://datasheet.ciiva.com/30478/0900766b81250bd7-30478714.pdf?src-supplier=RSComponents, ComponentLink5Description=https://datasheet.ciiva.com/339/sd05t1-d-339830.pdf?src-supplier=Digi-Key, ComponentLink5URL=https://datasheet.ciiva.com/339/sd05t1-d-339830.pdf?src-supplier=Digi-Key, ComponentLink6Description=https://datasheet.ciiva.com/339/sd05t1-d-339831.pdf?src-supplier=Digi-Key, ComponentLink6URL=https://datasheet.ciiva.com/339/sd05t1-d-339831.pdf?src-supplier=Digi-Key, ComponentLink7Description=https://datasheet.ciiva.com/11193/sd05t1-d-11193467.pdf?src-supplier=Avnet, ComponentLink7URL=https://datasheet.ciiva.com/11193/sd05t1-d-11193467.pdf?src-supplier=Avnet, ComponentLink8Description=https://datasheet.ciiva.com/22637/1878253-22637228.pdf?src-supplier=Element14, ComponentLink8URL=https://datasheet.ciiva.com/22637/1878253-22637228.pdf?src-supplier=Element14, ComponentLink9Description=https://datasheet.ciiva.com/25956/sd05t1-d-25956638.pdf?src-supplier=Avnet+Europe, ComponentLink9URL=https://datasheet.ciiva.com/25956/sd05t1-d-25956638.pdf?src-supplier=Avnet+Europe, Composition=Zener, Contact Plating=Tin, Depth=1.25mm, Direction=Unidirectional, Element Configuration=Single, ESD Protection=Yes, Height=1mm, Lead Free="Lead Free", Length=1.7mm, Manufacturer Part Number=SD05T1G, Max Reverse Leakage Current=10uA, Max Surge Current=24A, Number of Elements=1, Number of Pins=2, Number of Unidirectional Channels=1, Packaging="Tape and Reel", Peak Pulse Current=24A, Polarity=Unidirectional, Power Dissipation=350W, Pricing 1="1 = 0.49000, 10 = 0.36500, 100 = 0.20680, 500 = 0.13698, 1000 = 0.10502 (USD)", Radiation Hardening=No, REACH SVHC="No SVHC", Reverse Breakdown Voltage=6.2V, Reverse Standoff Voltage=5V, RoHS=Yes, Stock 1=61559, Supplier 1=Digi-Key, Termination=SMD/SMT, Voltage Rating (DC)=5V, Width=1.35mm, Working Voltage=5V
DS1 DS2 DS3 DS4: library part CMP-2000-06426-1, "LED Uni-Color Red, 65 mW, 25 mA, -40 to 85 degC, 2-Pin SMD, RoHS, Tape and Reel", Emitting Color=Red, Forward Current=25mA, Forward Voltage=2.6V, Manufacturer=Avago, Operating Temp Range=-40Cto85C, Operating Temperature Classification=Industrial, Package Description="2-Pin Surface Mount Device, Body 3.2 x 1.6 mm", Package Reference=HSMX-C150, Package Type=ChipLed, Power Dissipation=78W, Reverse Voltage=5V, Test Current (It)=20mA, Chip Material=GaAlAs, Datasheet URL=http://media.digikey.com/pdf/Data%20Sheets/Avago%20PDFs/HSMz-Czzz.pdf, Datasheet Version=03/2012, DELETED=Compliant, Dominant Wave Length=639nm, High Brightness=No, Lens Dimensions=2x1.6x0.6mm, Lens Type=ColorlessDiffused, Lum Intensity=17mcd, Luminous Intensity=17mcd, Main Category=ChipLED, Manufacturer URL=http://www.avagotech.com/, Mounting=SurfaceMount, Mounting Technology=SurfaceMount, Number of  Elements=1, Packaging=TapeandReel, Peak Wavelength=660nm, Pin Count=2, Product Depth (mm)=1.6mm, Product Height (mm)=1.1mm, Product Length (mm)=3.2mm, Rad Hardened=No, Shape Type=Rectangular, Type=Uni-Color, Viewing Angle=170deg
J1: "Conn Power HDR 6 POS 4.2mm Solder RA Thru-Hole 6 Terminal 1 Port Mini-Fit® Bag", Color=Natural, Manufacturer=Molex, Max Operating Temperature=105°C, Min Operating Temperature=-40°C, Package Quantity=3500, Supplier Part Number 1=WM13196-ND, Category="Headers and Wire Housings", ComponentLink1Description=https://datasheet.ciiva.com/6840/353180820-sd-6840231.pdf?src-supplier=Digi-Key, ComponentLink1URL=https://datasheet.ciiva.com/6840/353180820-sd-6840231.pdf?src-supplier=Digi-Key, ComponentLink2Description=https://datasheet.ciiva.com/26916/getdatasheetpartid-318364-26916676.pdf?src-supplier=Verical, ComponentLink2URL=https://datasheet.ciiva.com/26916/getdatasheetpartid-318364-26916676.pdf?src-supplier=Verical, Connector Type="Male Pin", Contact Mating Length=0.208inch, Contact Plating=Tin, Fastening Type=Ramp, Housing Color=Natural, Housing Material=Nylon, Length=13.8mm, Manufacturer Part Number=0353180620, Mount="Through Hole", Number of Contacts=6, Number of Ports=1, Number of Positions=6, Number of Rows=2, Number of Terminals=6, Orientation="Right Angle", Packaging=Bag, Pitch=4.2mm, RoHS=Yes, Row Spacing=0.165inch, Stock 1=6631, Supplier 1=Digi-Key, Termination=Solder
L1 L2: library part 742792510, "WURTH ELEKTRONIK - 742792510 - FERRITE BEAD, 70R, 6A, 1812", Case Code (Imperial)=1812, Case Code (Metric)=4532, Case/Package=SMD/SMT, Current Rating=6A, DC Resistance (DCR)=30mR, Manufacturer="Wurth Electronics", Max DC Current=3mA, Max Operating Temperature=125°C, Min Operating Temperature=-55°C, Package Quantity=1, Supplier Part Number 1=732-1640-1-ND, Test Frequency=100MHz, Tolerance=25%, Category="Ferrite Beads and Chips", ComponentLink1Description=https://datasheet.ciiva.com/1475/1695992-1475250.pdf?src-supplier=Farnell, ComponentLink1URL=https://datasheet.ciiva.com/1475/1695992-1475250.pdf?src-supplier=Farnell, ComponentLink2Description=https://datasheet.ciiva.com/11803/0900766b80bbd134-11803157.pdf?src-supplier=RSComponents, ComponentLink2URL=https://datasheet.ciiva.com/11803/0900766b80bbd134-11803157.pdf?src-supplier=RSComponents, ComponentLink3Description=https://datasheet.ciiva.com/23762/742792510-23762981.pdf?src-supplier=Newark, ComponentLink3URL=https://datasheet.ciiva.com/23762/742792510-23762981.pdf?src-supplier=Newark, ComponentLink4Description=https://datasheet.ciiva.com/4940/742792510-72179-4940456.pdf?src-supplier=Mouser, ComponentLink4URL=https://datasheet.ciiva.com/4940/742792510-72179-4940456.pdf?src-supplier=Mouser, ComponentLink5Description=https://datasheet.ciiva.com/1013/742792510-1013644.pdf?src-supplier=Digi-Key, ComponentLink5URL=https://datasheet.ciiva.com/1013/742792510-1013644.pdf?src-supplier=Digi-Key, ComponentLink6Description=https://datasheet.ciiva.com/1013/742792510-1013645.pdf?src-supplier=Digi-Key, ComponentLink6URL=https://datasheet.ciiva.com/1013/742792510-1013645.pdf?src-supplier=Digi-Key, ComponentLink7Description=https://datasheet.ciiva.com/1126/1695992-1126824.pdf?src-supplier=Element14, ComponentLink7URL=https://datasheet.ciiva.com/1126/1695992-1126824.pdf?src-supplier=Element14, ComponentLink8Description=https://datasheet.ciiva.com/1013/742792510-1013646.pdf?src-supplier=Digi-Key, ComponentLink8URL=https://datasheet.ciiva.com/1013/742792510-1013646.pdf?src-supplier=Digi-Key, Depth=3.2mm, Height=1.5mm, Impedance=70R, Lead Free="Lead Free", Length=4.5mm, Manufacturer Part Number=742792510, Material=Ferrite, Max Current Rating=6A, Mount="Surface Mount", Number of Lines=1, Packaging="Tape and Reel", REACH SVHC=Unknown, Resistance=30mR, RoHS=Yes, Stock 1=5974, Supplier 1=Digi-Key, Termination=SMD/SMT, Weight=0.003951oz, Width=3.2mm
L3 L4: library part 7427932, "Ferrite Bead 98 Ohm 2SMD 1LN", Case Code (Imperial)=1812, Case Code (Metric)=4532, Case/Package=SMD/SMT, DC Resistance (DCR)=0.9mR, Manufacturer="Wurth Electronics", Max Current Rating=6A, Max Operating Temperature=125°C, Min Operating Temperature=-55°C, Package Quantity=1, Supplier Part Number 1=732-2394-1-ND, Test Frequency=100MHz, Tolerance=25%, Category="Ferrite Beads and Chips", ComponentLink1Description=https://datasheet.ciiva.com/1014/7427932-1014097.pdf?src-supplier=Digi-Key, ComponentLink1URL=https://datasheet.ciiva.com/1014/7427932-1014097.pdf?src-supplier=Digi-Key, ComponentLink2Description=https://datasheet.ciiva.com/1466/1696119-1466626.pdf?src-supplier=Element14, ComponentLink2URL=https://datasheet.ciiva.com/1466/1696119-1466626.pdf?src-supplier=Element14, ComponentLink3Description=https://datasheet.ciiva.com/11796/0900766b80f886b0-11796146.pdf?src-supplier=RSComponents, ComponentLink3URL=https://datasheet.ciiva.com/11796/0900766b80f886b0-11796146.pdf?src-supplier=RSComponents, ComponentLink4Description=https://datasheet.ciiva.com/23763/7427932-23763047.pdf?src-supplier=Newark, ComponentLink4URL=https://datasheet.ciiva.com/23763/7427932-23763047.pdf?src-supplier=Newark, ComponentLink5Description=https://datasheet.ciiva.com/4939/7427932-72413-4939403.pdf?src-supplier=Mouser, ComponentLink5URL=https://datasheet.ciiva.com/4939/7427932-72413-4939403.pdf?src-supplier=Mouser, ComponentLink6Description=https://datasheet.ciiva.com/1014/7427932-1014098.pdf?src-supplier=Digi-Key, ComponentLink6URL=https://datasheet.ciiva.com/1014/7427932-1014098.pdf?src-supplier=Digi-Key, ComponentLink7Description=https://datasheet.ciiva.com/1014/7427932-1014099.pdf?src-supplier=Digi-Key, ComponentLink7URL=https://datasheet.ciiva.com/1014/7427932-1014099.pdf?src-supplier=Digi-Key, ComponentLink8Description=https://datasheet.ciiva.com/22711/1696119-22711445.pdf?src-supplier=Element14, ComponentLink8URL=https://datasheet.ciiva.com/22711/1696119-22711445.pdf?src-supplier=Element14, Depth=4.75mm, Height=3mm, Impedance=98R, Length=7.8mm, Manufacturer Part Number=7427932, Max DC Current=6A, Mount="Surface Mount", Number of Lines=1, Packaging="Tape and Reel", REACH SVHC=Unknown, RoHS=Yes, Shielding=Unshielded, Stock 1=698, Supplier 1=Digi-Key, Termination=SMD/SMT, Width=0.187inch
P1: library part CMP-2000-05495-1, "Male Header, Pitch 2.77 mm, 2 Row, 9 Position, Height 12.52 mm, Tail Length 4.8 mm, -55 to 100 degC, RoHS, Tray", Color=Black, Current Rating=5A, Manufacturer=Norcomp, Operating Temperature=-50°C~100°C, Package Description="Male Header, Pitch 2.77 mm, 2 Row, 9 Position, Height 12.52 mm, Tail Length 4.8 mm", Standard Package=80, Voltage Rating=-, 3D Model=171-009-113Rzzz.pdf171-009-113Rzzz.stp171-009-113Rzzz.igs, Associated Product=160-09MA-ND-DUSTCOVERFORDB9MALE, Catalog Drawings=Footprint9,15,25-,37Position171,172SeriesDipSolder, Category=Connectors,Interconnects, Connector Style=D-Sub, Connector Type=Plug,MalePins, Contact Finish=Gold, Contact Finish Thickness=Flash, Contact Type=Signal, Datasheet URL=http://www.norcomp.net/rohspdfs/Connectors/17Y/171/171-YYY-113RYY1.pdf, Datasheet Version="Rev. 11, 09/2015", Family=D-SubConnectors, Features=BoardLock,GroundingIndents, Flange Feature=MatingSide,FemaleScrewlock(4-40), Housing Material=Polyamide(PA9T),Nylon9T, Ingress Protection=-, Manufacturer URL=http://www.norcomp.net/, Mating Products=4209FE-ND-CONND-SUBRCPT9POSVERTSOLDER709FE-ND-CONNDB9CRIMPFEMALENICKEL709FER-ND-CONNDB9CRIMPFEMALETIN186-009-292L001-ND-CONNDSUBRCPT9POSSTRIDC186-009-292L551-ND-CONNDSUBRCPT9POSSTRIDC209F-ND-CONNDSUBRCPT9POSSTRSLDRCUP709F-ND-CONNDB9CRIMPFEMALETIN1709F-ND-CONNDB9CRIMPFEMYLWCHROME4209F-ND-CONND-SUBRCPT9POSVERTSOLDER1709FA-ND-CONNDB9CRIMPFEMYLWCHROME209FEA-ND-CONNDSUBRCPT9POSSTRSLDRCUP, Mounting Technology=ThroughHole, Mounting Type=ThroughHole, Number of Positions=9, Number of Rows=2, Online Catalog=171Series, Other Names=171009113R9119209ME, Other Related Documents=171-009-113R911MaterialDeclaration, Package Reference=171-009-113R911, Packaging=Tray, Product Training Modules=D-SubConnectors, Series=171, Shell Material, Finish=Steel,NickelPlated, Shell Size, Connector Layout=1(DE,E), Termination=Solder
P2: library part CMP-1502-00440-1, "THT Male Header WR-MPC3, Vertical, Single Row, pitch 3 mm, 2 pins", Contact Resistance=10mOhm, Manufacturer="Wurth Elektronik", Operating Temperature=-40to105degC, Working Voltage=250VAC, Datasheet URL=https://katalog.we-online.de/em/datasheet/6620xx11122.pdf, Gender=Male, Manufacturer URL=http://www.we-online.de, Mounting Technology=THT, Orientation=Vertical, Package Reference=66200211122, Packaging=Tube, Part Number=66200211122, Pin Number=2, Pitch=3mm, Publisher=WurthElektronik
P3: library part CMP-2000-05419-1, "Male Header, Pitch 2.54 mm, 1 x 4 Position, Height 10.03 mm, Tail Length 3.56 mm, RoHS, Bulk", Color=White, Current, Rating="5 /  / A", Flammability Rating=UL94V-0, Manufacturer="TE Connectivity", Temperature, Operating="-55to+105 /  / degC", Voltage, Rating="250 /  / V", Agency Approvals=CSA,UL, Angle=Straight, Brand/Series=MTA-100Series, Color, Housing=White, Connector Type=MTA-100, Contact Centerline Spacing="0.100 /  / in.", Contact Mating Area Plating=Tin, Contact Plating=Tin, Contact Shape=Square, Contact Termination Area Plating=Tin, Datasheet URL=https://datasheet.ciiva.com/16286/eng-ds-82056-mta-0608-16286228.pdf, Datasheet Version=Dec-14, Length, Overall="0.4 /  / \"", Length, Pin="0.14 /  / \"", Length, Terminal Post="0.14 /  / in.", Manufacturer URL=http://www.te.com/, Material, Contact=CopperAlloy, Material, Housing=Polyester, Mount Angle=Vertical, Mounting Hole Size="0.04 /  / \"", Mounting Type=PCMount, Number of Contacts=4, Number of Positions=4, Number of Rows=1, Pin Spacing="0.1 /  / \"", Primary Type=InterconnectSystem, Size, Post="0.025 /  / in.", Special Features=Pinstrip, Standards=RoHSCompliant,ELVCompliant,UL94V-0, Termination=Solder, Type=PCBPlug
P4 P5 P6: library part CMP-1024-00327-1, "0.025\" SQ Post Header, Through-hole, Vertical, -55 to 125 degC, 2.54 mm Pitch, 2-Pin, Male, RoHS", Manufacturer=Samtec, PartNumber=TSW-102-26-G-S, Temperature Range="-55 to 125 degC", ComponentLink1Description="Manufacturer URL", ComponentLink1URL=http://www.samtec.com, ComponentLink2Description=Datasheet, ComponentLink2URL=http://www.samtec.com/documents/webfiles/pdf/TSW_TH.PDF, ComponentLink3Description="Package Specification", ComponentLink3URL=http://www.samtec.com/documents/webfiles/cpdf/TSW-XXX-XX-XXX-X-XX-XXX-MKT.pdf, DatasheetVersion=F-214, Mounting Technology=Through-hole, Orientation=Vertical, PackageDescription=".025[0.64] SQ. Post Terminal Strip Assembly", PackageReference=TSW-102-26-XX-S, PackageVersion="DM, 8/1988", Pitch="2.54 mm", RoHS=True
P7: library part CMP-1502-00554-1, "THT Male Header WR-MPC4, Vertical, Single Row, pitch 4.2 mm, 4 pins", Contact Resistance=10mOhm, Manufacturer="Wurth Elektronik", Operating Temperature=-40to105degC, Working Voltage=600VAC, Datasheet URL=https://katalog.we-online.de/em/datasheet/6490xx11122.pdf, Gender=Male, Manufacturer URL=http://www.we-online.de, Mounting Technology=THT, Orientation=Vertical, Package Reference=64900411122, Packaging=Tray, Part Number=64900411122, Pin Number=4, Pitch=4.2mm, Publisher=WurthElektronik
P8: library part CMP-1024-00338-1, "0.025\" SQ Post Header, Through-hole, Vertical, -55 to 125 degC, 2.54 mm Pitch, 6-Pin, Male, RoHS", Manufacturer=Samtec, PartNumber=TSW-103-08-G-D, Temperature Range="-55 to 125 degC", ComponentLink1Description="Manufacturer URL", ComponentLink1URL=http://www.samtec.com, ComponentLink2Description=Datasheet, ComponentLink2URL=http://www.samtec.com/documents/webfiles/pdf/TSW_TH.PDF, ComponentLink3Description="Package Specification", ComponentLink3URL=http://www.samtec.com/documents/webfiles/cpdf/TSW-XXX-XX-XXX-X-XX-XXX-MKT.pdf, DatasheetVersion=F-214, Mounting Technology=Through-hole, Orientation=Vertical, PackageDescription=".025[0.64] SQ. Post Terminal Strip Assembly", PackageReference=TSW-103-08-X-D, PackageVersion="DM, 8/1988", Pitch="2.54 mm", RoHS=True
P9: library part CMP-2000-06636-1, "Male Header, Pitch 2.54 mm, 2 x 3 Position, Height 8.64 mm, Tail Length 3 mm, -40 to 105 degC, RoHS, Bulk", Color=Black, Manufacturer=Harwin-Inc., Package Description="Male Header, Pitch 2.54 mm, 2 x 3 Position, Height 8.64 mm, Tail Length 3 mm", Category=Connectors,Interconnects, Connector Type=Header,Unshrouded,Breakaway, Contact Finish=Tin, Contact Finish Thickness=-, Contact Mating Length="0.240\"(6.10mm)", Contact Type=MalePin, Datasheet URL=https://datasheet.ciiva.com/26899/getdatasheetpartid-483857-26899433.pdf, Datasheet Version=12/2006, Family=RectangularConnectors-Headers,MalePins, Fastening Type=-, Features=-, Manufacturer URL=https://www.harwin.com/, Mounting Technology=ThroughHole, Mounting Type=ThroughHole, Number of Positions=6, Number of Positions Loaded=All, Number of Rows=2, Package Reference=M20-9980346, Packaging=Bulk, Pitch="0.100\"(2.54mm)", Row Spacing="0.100\"(2.54mm)", Series=M20, Termination=Solder
Q1 Q2: library part CMP-1048-00631-1, "General Purpose Transistor, NPN Silicon, 3-Pin SOT-23, Pb-Free, Tape and Reel", Manufacturer="On Semiconductor", PartNumber=MMBT3904LT1G, ComponentLink1Description="Manufacturer URL", ComponentLink1URL=http://www.onsemi.com/, ComponentLink2Description=Datasheet, ComponentLink2URL=http://www.onsemi.cn/pub_link/Collateral/MMBT3904LT1-D.PDF, ComponentLink3Description="Package Specification", ComponentLink3URL=http://www.onsemi.cn/pub_link/Collateral/318-08.PDF, DatasheetVersion="Rev. 12", fT Min (MHz)=300, IC Continuous (A)=0.2, Mounting Technology="Surface Mount", PackageDescription="3-Pin Small Outline Transistor, Body 2.92 x 1.3 mm, Pitch 0.95 mm", PackageReference=SOT-23-3-318-08, PackageVersion="Rev. AP, 11/2009", Packing="Tape and Reel", Polarity=NPN, RoHS=TRUE
R4: library part CMP-2100-03664-1, "Chip Resistor, 10 KOhm, +/- 1%, 01 W, -55 to 155 degC, 0603 (1608 Metric), RoHS, Tape and Reel", Case Code (Imperial)=0603, Case Code (Metric)=1608, Manufacturer=Yageo, Max Operating Temperature=155degC, Min Operating Temperature=-55degC, Package Description="2-Pin Surface Mount Device, Body 1.6 x 0.8 mm", Power Rating=100mW, Resistance=10KOhm, Temperature Coefficient=100ppm/degreesC, Tolerance=1%, Voltage Rating=75V, Voltage Rating (DC)=50V, Case/Package=0603, Composition=ThickFilm, Datasheet URL=http://www.yageo.com/NewPortal/yageodocoutput?fileName=/pdf/R-Chip/PYu-RC_Group_51_RoHS_L_5.pdf, Datasheet Version="Rev. 5, 10/2016", Depth=0.8mm, Height=0.45mm, Lead Free=LeadFree, Lead Pitch=0.3mm, Length=1.6mm, Manufacturer URL=http://www.yageo.com/, Military Standard=Not, Number of Pins=2, Package Reference=0603, Packaging=TapeandReel, REACH SVHC=NoSVHC, RoHSCompliant=true, Termination=SMD/SMT, Weight=7.1E-05oz, Width=0.8mm
R5 R12 R13 R14 R15: library part CMP-2001-03595-1, Manufacturer="Vishay Dale", Part Number=CRCW08051K00FKEA
R6 R7: library part CMP-2003-00383-1, Manufacturer=Panasonic, Part Number=ERJ-8ENF4640V
R8 R9 R10 R11: library part CMP-1666-00005-4, "Chip Resistor, 10 KOhm, +/- 1%, 100 mW, -55 to 155 degC, 0603 (1608 Metric), RoHS, Tape and Reel", Manufacturer="Vishay Semiconductor", Max Operating Temperature="155 degC", Min Operating Temperature="-55 degC", Package Quantity=5000, Voltage Rating="75 V", ComponentLink1Description="Manufacturer URL", ComponentLink1URL=http://www.vishay.com/, ComponentLink2Description=Datasheet, ComponentLink2URL=https://datasheet.ciiva.com/11809/0900766b80d98afc-11809037.pdf, DatasheetVersion=06/2012, Height="0.45 mm", Length="1.55 mm", Mounting Technology="Surface Mount", PackageDescription="2-Pin Surface Mount Device, Body 1.575 x 0.85 mm", PackageReference=0603, Packaging="Tape and Reel", REACH SVHC=Unknown, RoHSCompliant=true
SW1: library part CMP-2000-05160-1, "6 mm Tact Switche, SPST, NO, -20 to 60 degC, 4-Pin SMT, RoHS, Tape and Reel", Manufacturer="ITT Cannon", Datasheet URL=https://datasheet.ciiva.com/29903/getdatasheetpartid-786341-29903846.pdf, Datasheet Version=Feb-14, Manufacturer URL=http://www.ittcannon.com/
U1: "1A DC/DC-CONVERTER INNOLINE SM", Manufacturer=Recom, Supplier Part Number 1=945-3250-1-ND, ComponentLink1Description=https://www.recom-power.com/pdf/Innoline/RPM-1.0.pdf?src-supplier=Digi-Key, ComponentLink1URL=https://www.recom-power.com/pdf/Innoline/RPM-1.0.pdf?src-supplier=Digi-Key, Manufacturer Part Number=RPM5.0-1.0, RoHS=No, Stock 1=175, Supplier 1=Digi-Key
U2: "1A DC/DC-CONVERTER INNOLINE SM", Manufacturer=Recom, Supplier Part Number 1=945-3249-1-ND, ComponentLink1Description=https://www.recom-power.com/pdf/Innoline/RPM-1.0.pdf?src-supplier=Digi-Key, ComponentLink1URL=https://www.recom-power.com/pdf/Innoline/RPM-1.0.pdf?src-supplier=Digi-Key, Manufacturer Part Number=RPM3.3-1.0, RoHS=No, Stock 1=319, Supplier 1=Digi-Key
U3: library part CMP-0237-00079-3, "ARM Cortex-M3 32-bit MCU, 256 KB Flash, 64 KB Internal RAM, 51 I/Os, 64-pin LQFP, -40 to 85 degC, Tray", I/Os (High Current)=51, Operating Frequency(F) (Processor speed) (MHz)=72, Supply Voltage(Vcc) min (V)=2, A/D Converter="2x12-bit (16 Channel)", ComponentLink1Description="Manufacturer URL", ComponentLink1URL=http://www.st.com/web/en/home.html, ComponentLink2Description=Datasheet, ComponentLink2URL=http://www.st.com/st-web-ui/static/active/en/resource/technical/document/datasheet/CD00220364.pdf, ComponentLink3Description="Package Specification", ComponentLink3URL=http://www.st.com/st-web-ui/static/active/en/resource/technical/document/datasheet/DM00037051.pdf, Core="ARM Cortex-M3", D/A Converter="2x12-bit (2 Channel)", DatasheetVersion="Rev. 6", FLASH Size (Prog) (kB)=256, Internal RAM Size (kB)=64, Mounting Technology="Surface Mount", PackageDescription="64-Pin Low Profile Quad Flat Package, 10 x 10 mm Body, 0.5 mm Pitch", PackageReference=LQFP64, PackageVersion="Rev. 4, 06/2013", Packing=Tray, PartNumber=STM32F107RCT6
U4: library part CMP-0186-00138-2, "High-Speed CAN Transceiver, 8-Pin SOIC, Industrial Temperature", Code_IPC=SOIC127P600-8, Code_JEDEC=MS-012, ComponentLink1Description="Manufacturer URL", ComponentLink1URL=http://www.microchip.com/, ComponentLink2Description=Datasheet, ComponentLink2URL=http://ww1.microchip.com/downloads/en/DeviceDoc/21667F.pdf, ComponentLink3Description="Package Specification", ComponentLink3URL=http://www.microchip.com/stellent/groups/techpub_sg/documents/packagingspec/en012702.pdf, DatasheetVersion="revF, Jul-2010", PackageDescription="8-Lead Plastic Small Outline (SN) - Narrow, 3.90mm Body [SOIC]", PackageReference=SOIC-SN8, PackageVersion="revBB, Aug-2009", RevisionNote="URLs added. DatasheetVersion updated."
U6: "802.15.4 Transceiver Module 2.4GHz Antenna Not Included, U.FL Through Hole", Package="Module Digi International", Availability=Unavailable, MF="Digi International", MP=XBP24CAUIT-001, Price=None, SnapEDA_Link=https://www.snapeda.com/parts/XBP24CAUIT-001/Digi%20International/view-part/1219456/?ref=snap
X1: library part CMP-0447-00001-2, "Crystal, 32.768 kHz, 12.5 pF, -40 to 85 degC, SMD Low Profile 3.2 x 1.5 x 0.9 mm, Tape and Reel", Equivalent Series Resistance (R1)="70 Kohm", Frequency="32.768 kHz", Frequency Tolerance @+25degC="+/- 20 ppm", Insulation Resistance (Min)="500 Mohm", Load Capacitance (CL)="12.5 pF", Manufacturer=Abracon, Operating Temperature="-40 to 85 degC", PartNumber=ABS07-32.768KHz-T, Q Value (Type)=30000, Shunt Capacitance (C0)="0.9 to 1.2 pF", ComponentLink1Description="Manufacturer URL", ComponentLink1URL=http://www.abracon.com/, ComponentLink2Description=Datasheet, ComponentLink2URL=http://www.abracon.com/Resonators/ABS07.pdf, ComponentLink3Description="Package Specification", ComponentLink3URL=http://www.abracon.com/Resonators/ABS07.pdf, DatasheetVersion=04.03.13, Drive Level (Type)="0.1 uW", Mounting Technology="Surface Mount", Operation Mode="Flexural Mode (Tuning Fork)", PackageDescription="2-Pin Hand Drawn, Body 3.2x1.5mm, Pitch 2.5mm", PackageReference=ABS07-2, Packing="Tape and Reel"
X2: library part CMP-2000-05033-1, "Miniature Ceramic Crystal, 8 MHz, -40 to 85 degC, 2-Pin SMD, RoHS, Tape and Reel", Case Height=1.3mm, Case Length=5mm, Case Width=3.2mm, Frequency Stability=30PPM, Load Capacitance=18pF, Manufacturer=ABRACON, Operating Temperature Range=-40Cto+85C, Package / Case=5mmx3.2mm, Package Description="2-Pin Surface Mount Device, Body 5 x 3.2 mm", Package Reference=ABM3-2, Tolerance=20PPM, Brand=ABRACON, Datasheet URL=http://www.farnell.com/datasheets/1754353.pdf, Datasheet Version=Sep-13, Dimensions=3.2mmWx5mmLx1.3mmH, ESR=140Ohms, Factory Pack Quantity=1000, Frequency=8MHz, Manufacturer URL=http://www.abracon.com/, Mounting Style=SMD/SMT, Package URL=http://www.abracon.com/Support/PackageDrawing/Resonators/ABM3.PDF, Packaging=Reel, Product Category=Crystals, RoHS=Details, Series=ABM3, Termination Style=SMD/SMT, Type=MiniatureCeramicCrystal
1: DeviceSetName=XBEE_SMD_ADAPTER, GateName_1=G$1, LibraryName=UBCSolar, Package=XBEE_SMD_ADAPTER, SymbolName_1=XBEE_SMD_ADAPTER

## Via types
v1: diameter 50, hole 28, Top Layer to Bottom Layer, 70 vias

## Nets (pads, with @x,y where several pads share a name; then routed paths per layer and width w, separated by ;. In a path a pad name is that pad's centre, name@x,y a point inside that pad or via, vN(x,y) a via of type N, cw(c..) or ccw(c..) an arc to the next point about the centre after c; other vN are vias at no path point)
5V: C2.2 C6.1 D2.2 L2.1 L4.2 P5.1 U4.3 | length 7857.3
  Top Layer w6: P5.1 3125,3130 3195,3060 3195,2925 ; D2.2 3165,2955 3195,2925 ; C2.2 3275,2845 ; C6.1 3225,2740 3275,2790 3330,2790 ; L2.1 3425,2750 3415,2760 ; L4.2 3715,2453.51 3711.49,2450 3615,2450 ; v1(3820,2920) 3820,2495 3745,2420 3645,2420 3615,2450 ; U4.3 4650,4140 v1(4685,4105) ; 3195,2925 3275,2845 ; 3275,2845 3330,2790 ; 3330,2790 3360,2760 3415,2760 ; 3415,2760 3580,2760 3605,2735 3605,2460 3615,2450
  Bottom Layer w6: v1(3820,2920) 3820,3260 3550,3530 3550,3740 3275,4015 3275,4905 3330,4960 5160,4960 5185,4935 5185,4510 5140,4465 5075,4465 4715,4105 v1(4685,4105)
12V: C1.1 L1.1 P2.1 P4.1 | length 1444.1
  Top Layer w10: P2.1 v1(3160,3760) 3225,3825 3294.14,3825 ; C1.1 3300,3819.14 3294.14,3825 ; L1.1 3255.86,3495 3250,3500.86 3250,3570 3260,3580 3345,3580 3355,3590 3355,3810 3340,3825 3294.14,3825
  Bottom Layer w10: P4.1 3135,3315 3185,3365 3185,3728.43 3160,3753.43 v1(3160,3760)
BOOT0: P9.3 R15.2 U3.60 | length 1802.5
  Top Layer w6: v1(4328.05,4211.95) 4328.05,3928.52 U3.60 ; v1(4880,4135) 4885,4135 v1(4950,4070) ; v1(4960,3875) 5005,3830 5005,3795 5030,3770 5180,3770 5210,3800 5210,3850 ; R15.2 5195,3835 5210,3850 ; P9.3 5210,3850
  Bottom Layer w6: v1(4328.05,4211.95) 4330,4210 4355,4210 4450,4115 4525,4040 4785,4040 v1(4880,4135) ; v1(4950,4070) 4950,3885 v1(4960,3875)
BOOT1: P9.4 R14.2 U3.28 | length 2046.1